# Altium PCB PCB_PlacaIndividual_v00_.PcbDoc
Units mm, origin at the board's own origin, x right, y up, seen from the top; angles counter-clockwise.
Board outline 50.04 x 23.74 mm, 2 copper layers (Top Layer, Bottom Layer); 27 components, 39 nets, 126 pads, 0 vias.
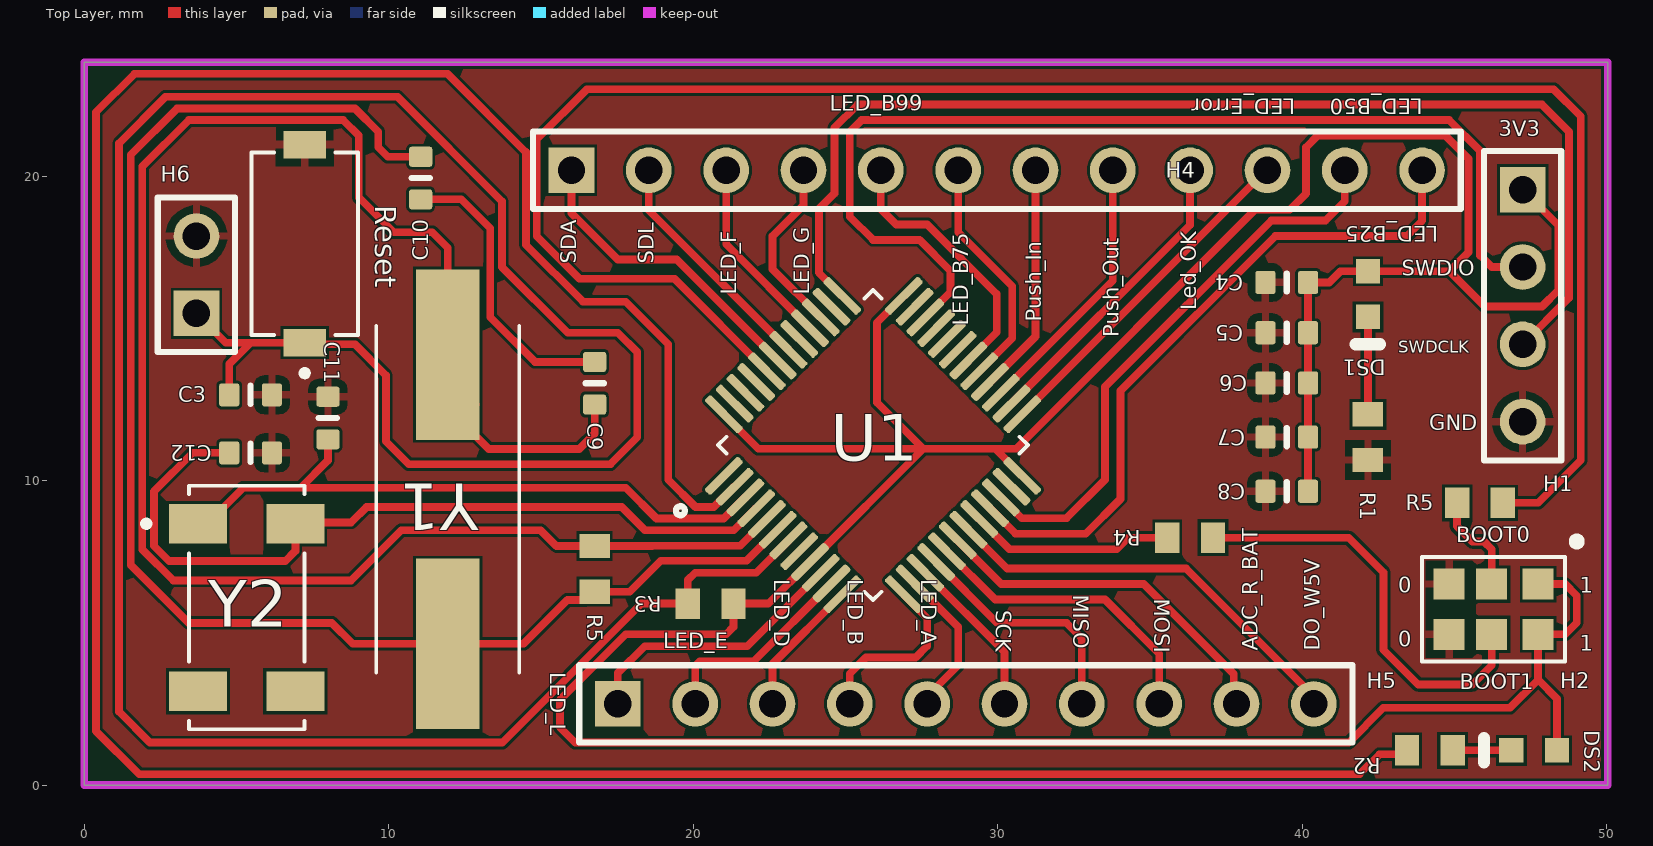
[diagram p0: Top Layer view]
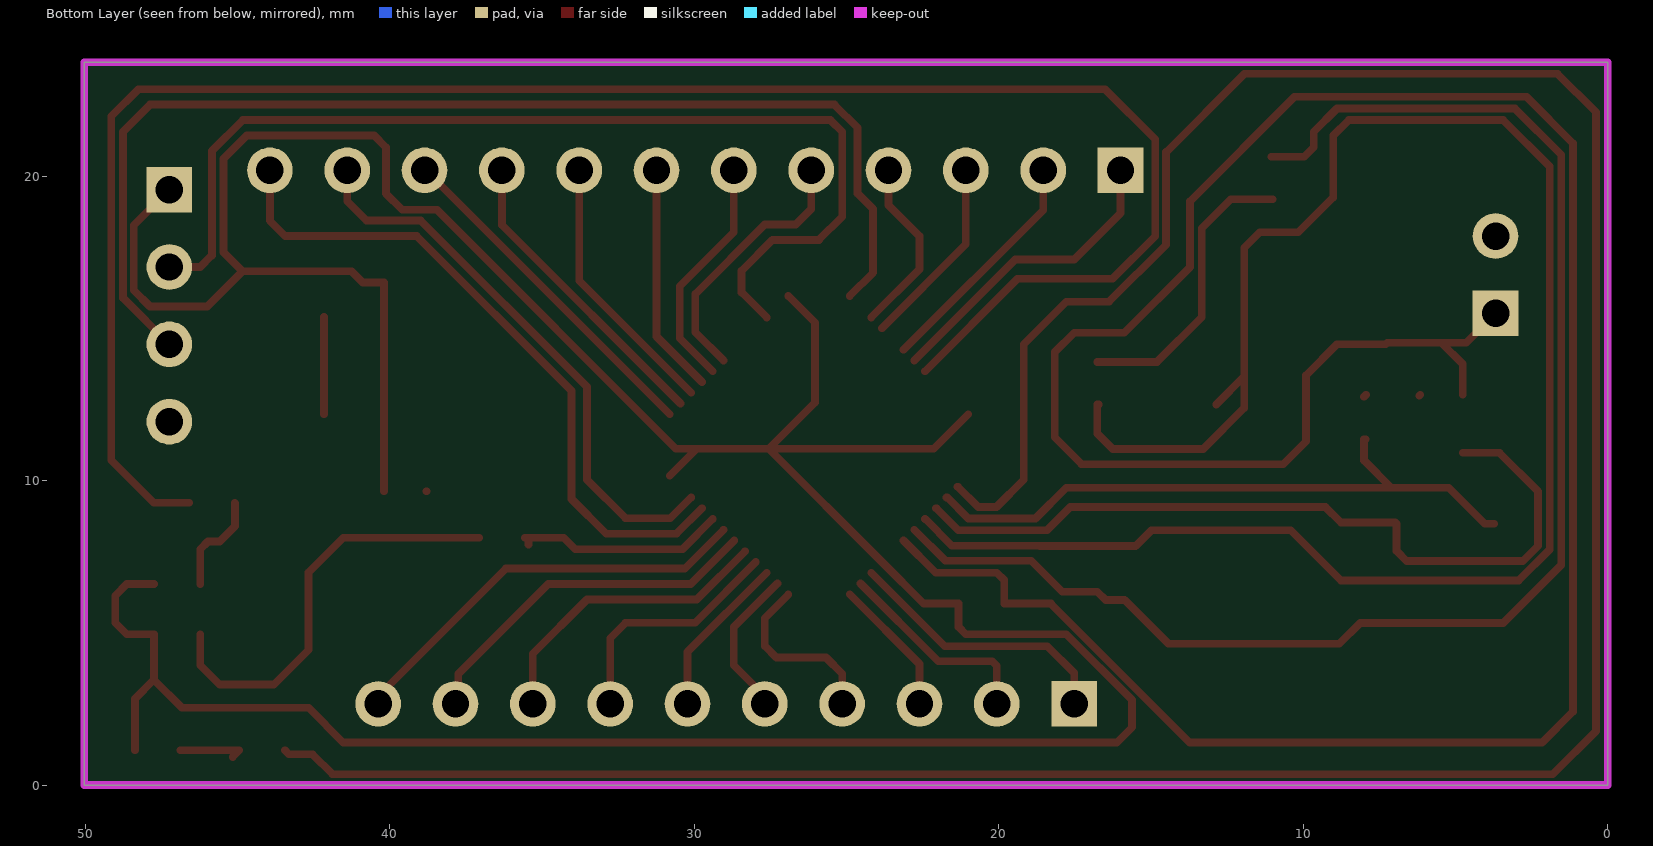
[diagram p1: Bottom Layer view, seen from below]
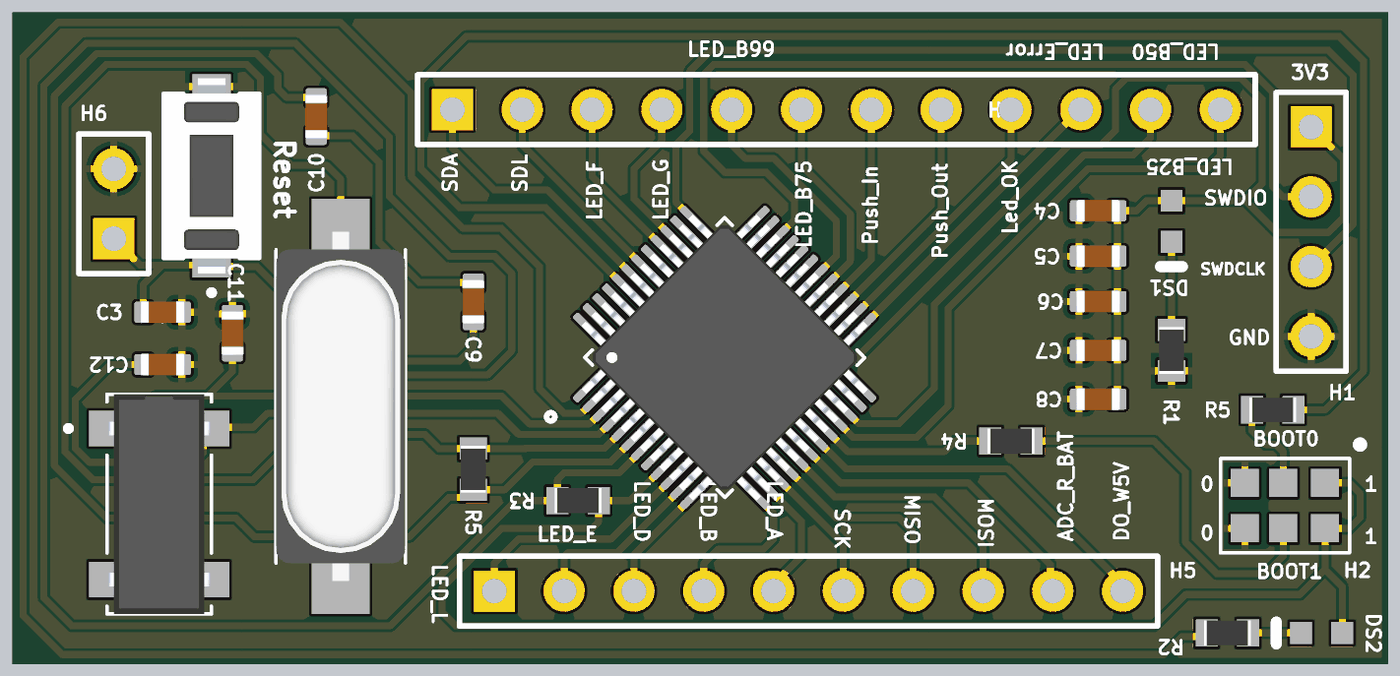
[diagram p2: 3D render of the assembled board from above, using the file's embedded part models]

## Layer stack, top to bottom
Top Solder: solder mask 0.0102, Solder Resist, Dk 3.5
Top Layer: signal copper 0.0356
Dielectric 1: dielectric 0.32, FR-4, Dk 4.8
Bottom Layer: signal copper 0.0356
Bottom Solder: solder mask 0.0102, Solder Resist, Dk 3.5

## Board outline
0,0 0,23.741 50.038,23.741 50.038,0

## Design rules (kind name [scope] priority, off if disabled: settings)
Clearance [All] p1: gap=0.1 ignorepadtopadclearanceinfootprint=FALSE
PolygonConnect [All] p1: connectstyle=Relief reliefconductorwidth=0.254 reliefentries=4 polygonreliefangle="90 Angle" airgapwidth=0.254
RoutingVias [All] p1: holewidth=0.3 width=0.8 viastyle="Through Hole" minholewidth=0.3 minwidth=0.8 maxholewidth=0.3 maxwidth=0.8
SolderMaskExpansion [All] p1: expansion=0.102 istentingtop=FALSE
SupplyNets "Schematic Supply Nets_1" [InNet('GND')] p1: voltage=0.000
SupplyNets "Schematic Supply Nets" [InNet('VCC3V3')] p2: voltage=0.000
Width [All] p1: maxlimit=0.254 minlimit=0.254 preferedwidth=0.254
30 further rules are at their usual default settings.

## Components (designator, comment, footprint, x,y, rotation, side; value= is the part's Value field where it differs from the comment)
C3 "Capacitor 10µF +/-20% 10V 0603" CAPC0603(1608)100_L 5.461,12.819 r0 top value=1µF
C4 "Capacitor 10µF +/-20% 10V 0603" CAPC0603(1608)100_L 39.497,16.51 r180 top value=0.1µF
C5 "Capacitor 10µF +/-20% 10V 0603" CAPC0603(1608)100_L 39.497,14.859 r180 top value=0.1µF
C6 "Capacitor 10µF +/-20% 10V 0603" CAPC0603(1608)100_L 39.497,13.208 r180 top value=0.1µF
C7 "Capacitor 10µF +/-20% 10V 0603" CAPC0603(1608)100_L 39.497,11.43 r180 top value=0.1µF
C8 "Capacitor 10µF +/-20% 10V 0603" CAPC0603(1608)100_L 39.497,9.652 r180 top value=0.1µF
C9 "Capacitor 10µF +/-20% 10V 0603" CAPC0603(1608)100_L 16.764,13.2 r270 top value=20pF
C10 "Capacitor 10µF +/-20% 10V 0603" CAPC0603(1608)100_L 11.049,19.939 r90 top value=20pF
C11 "Capacitor 10µF +/-20% 10V 0603" CAPC0603(1608)100_L 8.001,12.057 r270 top value=20pF
C12 "Capacitor 10µF +/-20% 10V 0603" CAPC0603(1608)100_L 5.461,10.914 r180 top value=20pF
DS1 "LTW-C191TS5" LTST-LTW-C191TS5_V 42.164,16.129 r270 top
DS2 "LTW-C191TS5" LTST-LTW-C191TS5_V 47.625,1.143 r180 top
H1 "Header 4" HDR1X4 47.244,19.558 r270 top
H2 "MHDR2X3" SW_219-3LPSTR 45.339,4.191 r270 top
H4 "Header 12" HDR1X12 16.002,20.193 r0 top
H5 "Header 10" HDR1X10 17.526,2.667 r0 top
H6 "Header 2" HDR1X2 3.683,15.494 r90 top
R1 "Resistor 10k +/-1% 0603 100 mW" RESC1608X55X25ML10T15 42.164,11.43 r270 top value=510
R2 "Resistor 10k +/-1% 0603 100 mW" RESC1608X55X25ML10T15 44.196,1.143 r180 top value=510
R3 "Resistor 10k +/-1% 0603 100 mW" RESC1608X55X25ML10T15 20.574,5.961 r180 top value=10K
R4 "Resistor 10k +/-1% 0603 100 mW" RESC1608X55X25ML10T15 36.322,8.128 r0 top value=100K
R5 "Resistor 10k +/-1% 0603 100 mW" RESC1608X55X25ML10T15 45.847,9.271 r180 top value=100K
R5 "Resistor 10k +/-1% 0603 100 mW" RESC1608X55X25ML10T15 16.764,7.104 r270 top value=1M
Reset "PTS636_SM43J_SMTR_LFS" SW_PTS636_SM43J_SMTR_LFS 7.239,17.78 r90 top
U1 "STM32F103C8T6" QFP50P900X900X160-48N 25.908,11.168 r45 top
Y1 "ABLS-8.000MHZ-B2-T" XTAL_ABLS-8.000MHZ-B2-T 11.938,9.39 r270 top
Y2 "MC-306_32.768K-E3" XTAL_MC-306_32.768K-E3 5.334,5.834 r0 top

## Footprints (in the part's own frame and the unit in brackets; to place one, negate y for a bottom-side part, rotate by r counter-clockwise, add the part's x,y. Pads: shape width x height; smd on the part's side, far side on the other; paste and mask are expansions set on the pad)
CAPC0603(1608)100_L [mm] "Chip Capacitor, Body 1.6x0.8mm, Height 1.0mm, IPC High Density"
  rrect25% 0.66x0.76 smd: 1(-0.7,0) 2(0.7,0)
  silkscreen extent 0,-0.3 0,0.3, body extent -0.8,-0.4 0.8,0.4, height 0.95
HDR1X2 [mm] "Connector; Header; 2 Position"
  rect 1.5x1.5 hole 0.9: 1(0,0)
  round 1.5 hole 0.9: 2(2.54,0)
  silkscreen extent -1.27,-1.27 3.81,1.27
HDR1X4 [mm] "Connector; Header; 4 Position"
  rect 1.5x1.5 hole 0.9: 1(0,0)
  round 1.5 hole 0.9: 2(2.54,0) 3(5.08,0) 4(7.62,0)
  silkscreen extent -1.27,-1.27 8.89,1.27
HDR1X10 [mm] "Connector; Header; 10 Position"
  rect 1.5x1.5 hole 0.9: 1(0,0)
  round 1.5 hole 0.9: 2(2.54,0) 3(5.08,0) 4(7.62,0) 5(10.16,0) 6(12.7,0) 7(15.24,0) 8(17.78,0) 9(20.32,0) 10(22.86,0)
  silkscreen extent -1.27,-1.27 24.13,1.27
HDR1X12 [mm] "Connector; Header; 12 Position"
  rect 1.5x1.5 hole 0.9: 1(0,0)
  round 1.5 hole 0.9: 2(2.54,0) 3(5.08,0) 4(7.62,0) 5(10.16,0) 6(12.7,0) 7(15.24,0) 8(17.78,0) 9(20.32,0) 10(22.86,0) 11(25.4,0) 12(27.94,0)
  silkscreen extent -1.27,-1.27 29.21,1.27
LTST-LTW-C191TS5_V [mm] "SMD, 2-Leads, Body 1.6x0.8mm"
  rect 0.8x0.8 smd: 1(-0.75,0) 2(0.75,0)
  silkscreen extent 1.65,-0.4 1.65,0.4, body extent -0.8,-0.4 0.8,0.4, height 0.65
QFP50P900X900X160-48N [mm]
  rrect50% 1.56x0.28 smd: 1(-4.18,2.75) 2(-4.18,2.25) 3(-4.18,1.75) 4(-4.18,1.25) 5(-4.18,0.75) 6(-4.18,0.25) 7(-4.18,-0.25) 8(-4.18,-0.75) 9(-4.18,-1.25) 10(-4.18,-1.75) 11(-4.18,-2.25) 12(-4.18,-2.75) 25(4.18,-2.75) 26(4.18,-2.25) 27(4.18,-1.75) 28(4.18,-1.25) 29(4.18,-0.75) 30(4.18,-0.25) 31(4.18,0.25) 32(4.18,0.75) 33(4.18,1.25) 34(4.18,1.75) 35(4.18,2.25) 36(4.18,2.75)
  rrect50% 0.28x1.56 smd: 13(-2.75,-4.18) 14(-2.25,-4.18) 15(-1.75,-4.18) 16(-1.25,-4.18) 17(-0.75,-4.18) 18(-0.25,-4.18) 19(0.25,-4.18) 20(0.75,-4.18) 21(1.25,-4.18) 22(1.75,-4.18) 23(2.25,-4.18) 24(2.75,-4.18) 37(2.75,4.18) 38(2.25,4.18) 39(1.75,4.18) 40(1.25,4.18) 41(0.75,4.18) 42(0.25,4.18) 43(-0.25,4.18) 44(-0.75,4.18) 45(-1.25,4.18) 46(-1.75,4.18) 47(-2.25,4.18) 48(-2.75,4.18)
  silkscreen extent -6.15,-3.6 3.6,3.6, body extent -4.5,-4.5 4.5,4.5, height 1.6
RESC1608X55X25ML10T15 [mm] "Chip Resistor, 2-Leads, Body 1.70x0.90mm, IPC Low Density"
  rect 0.8x1 smd: 1(-0.75,0) 2(0.75,0)
  body extent -0.85,-0.45 0.85,0.45, height 0.55
SW_219-3LPSTR [mil]
  rect 40x40 smd: 1(-95,95) 2(-95,35) 3(-95,-20) 4(-30,95) 5(-30,35) 6(-30,-20)
  silkscreen extent -154,-55 5,149
SW_PTS636_SM43J_SMTR_LFS [mm]
  rect 0.9x1.4 smd: 1(-3.25,0) 2(3.25,0)
  silkscreen extent -4.35,-1.75 3,1.75, body extent -3.55,-1.75 3.55,1.75, height 4.3
XTAL_ABLS-8.000MHZ-B2-T [mm]
  rect 5.6x2.1 smd: 1(-4.75,0) 2(4.75,0)
  silkscreen extent -5.7,-2.35 5.7,2.35, body extent -6.35,-2.35 6.35,2.35, height 4.06
XTAL_MC-306_32.768K-E3 [mm]
  rect 1.9x1.3 smd: 1(-1.6,2.75) 2(-1.6,-2.75) 3(1.6,-2.75) 4(1.6,2.75)
  silkscreen extent -3.4,-4 1.9,4, body extent -1.85,-4 1.85,4, height 2.54

## Part data
C3 C4 C5 C6 C7 C8 C9 C10 C11 C12: library part CMP-001-00075-4, "Chip Capacitor, 10µF +/-20%, 10V, 0603, Thickness 1 mm", Case/Package=0603, Max Operating Temperature=85°C, Min Operating Temperature=-55°C, Tolerance=10%, Voltage Rating=10V, Mounting Technology=SMT, Pins=2
DS1 DS2: library part CMP-007-00027-2, "LED Uni-Color White, 70 mW, 20 mA, -20 to 80 degC, 2-Pin SMD, RoHS, Tape and Reel", Case/Package=0603, Colour=White, Forward Current=5mA, Forward Voltage=3.15V, Manufacturer=Lite-On, Max Operating Temperature=80°C, Min Operating Temperature=-20°C, Package Description="2-Pin Surface Mount Device, Body 1.6 x 0.8 mm", Package Quantity=1, Power=70mW, Datasheet URL=http://optoelectronics.liteon.com/upload/download/DS22-2004-201/S_110_LTW-C191TS5.pdf, Datasheet Version="Rev. B, 06/2010", Illumination Colour=White, Lens Style=Diffused, Luminous Intensity=28mcd, Manufacturer URL=http://www.us.liteon.com/, Mounting Technology=SM, Nominal Vf=2.93V, Package Reference=LTW-C191TS5, Packaging=TapeandReel, Pins=2, RoHS Compliant=True, Viewing Angle=130degrees
H1: "Header, 4-Pin", LatestRevisionDate=17-Jul-2002, LatestRevisionNote="Re-released for DXP Platform.", Publisher="Altium Limited"
H2: "Header, 3-Pin, Dual row", LatestRevisionDate=17-Jul-2002, LatestRevisionNote="Re-released for DXP Platform.", Publisher="Altium Limited"
H4: "Header, 12-Pin", LatestRevisionDate=17-Jul-2002, LatestRevisionNote="Re-released for DXP Platform.", Publisher="Altium Limited"
H5: "Header, 10-Pin", LatestRevisionDate=17-Jul-2002, LatestRevisionNote="Re-released for DXP Platform.", Publisher="Altium Limited"
H6: "Header, 2-Pin", LatestRevisionDate=17-Jul-2002, LatestRevisionNote="Re-released for DXP Platform.", Publisher="Altium Limited"
R1 R2 R3 R4 R5 R5: library part CMP-009-00017-5, "Chip Resistor, 10 KOhm, +/- 1%, 01 W, -55 to 155 degC, 0603 (1608 Metric)", Case/Package=0603, Max Operating Temperature=155°C, Min Operating Temperature=-55°C, Power=100mW, Tolerance=1%, Voltage Rating=50V, Mounting Technology=SM, Pins=2, RoHS Compliant=True
Reset: "Tactile Switch SPST-NO Top Actuated Surface Mount", Package=None, Availability=Unavailable, MP=PTS636_SM43J_SMTR_LFS, Price=None
U1: "ARM® Cortex®-M3 STM32F1 Microcontroller IC 32-Bit 72MHz 64KB (64K x 8) FLASH 48-LQFP (7x7)", Package="LQFP-48 STMicroelectronics", Check_prices=https://www.snapeda.com/parts/STM32F103C8T6/STMicroelectronics/view-part/?ref=eda, MF=STMicroelectronics, MP=STM32F103C8T6, SnapEDA_Link=https://www.snapeda.com/parts/STM32F103C8T6/STMicroelectronics/view-part/?ref=snap
Y1: "HC/49US (AT49) SMD LOW PROFILE CRYSTAL", Package="HC49/US Abracon", Availability="In Stock", Check_prices=https://www.snapeda.com/parts/ABLS-8.000MHZ-B2-T/Abracon+LLC/view-part/?ref=eda, MF="Abracon LLC", MP=ABLS-8.000MHZ-B2-T, Price=None, Purchase-URL=https://pricing.snapeda.com/search/part/ABLS-8.000MHZ-B2-T/?ref=eda, SnapEDA_Link=https://www.snapeda.com/parts/ABLS-8.000MHZ-B2-T/Abracon+LLC/view-part/?ref=snap
Y2: "CRYSTAL 32.7680KHZ 6PF SMD", Package="NON STANDARD-4 EPSON", Availability="In Stock", Check_prices=https://www.snapeda.com/parts/MC-306%2032.768K-E3/EPSON/view-part/?ref=eda, MF=EPSON, MP="MC-306 32.768K-E3", Price=None, Purchase-URL="https://pricing.snapeda.com/search/part/MC-306 32.768K-E3/?ref=eda", SnapEDA_Link=https://www.snapeda.com/parts/MC-306%2032.768K-E3/EPSON/view-part/?ref=snap

## Nets (pads, with @x,y where several pads share a name; then routed paths per layer and width w, separated by ;. In a path a pad name is that pad's centre, name@x,y a point inside that pad or via, vN(x,y) a via of type N, cw(c..) or ccw(c..) an arc to the next point about the centre after c; other vN are vias at no path point)
GND: C3.2 C4.2 C5.2 C6.2 C7.2 C8.2 C11.1 C12.1 H1.4 H2.3 H2.6 H6.2 R1.2 Reset.2 | length 0.2
  Top Layer w0.254: C3.2 C3.2@6.192,12.788 ; C11.1@7.938,12.821 C11.1 C11.1@7.97,12.788 ; C8.2@38.793,9.656 C8.2 ; H1.4@46.728,11.93 H1.4@46.736,11.938
NetC3_1: C3.1 H6.1 R3.2 Reset.1 U1.7 | length 89.6
  Top Layer w0.254: H6.1 4.647,14.53 5.461,14.53 ; C3.1 4.761,13.83 5.461,14.53 ; U1.7 22.071,6.977 20.066,6.977 19.824,6.735 R3.2 18.288,5.961 13.724,1.397 2.159,1.397 1.143,2.413 1.143,21.082 2.667,22.606 10.287,22.606 13.716,19.177 13.716,17.018 15.875,14.859 17.526,14.859 18.161,14.224 18.161,11.422 17.28,10.541 10.66,10.541 9.906,11.295 9.906,13.462 8.89,14.478 7.291,14.478 Reset.1 5.461,14.53
NetC9_1: C9.1 C10.1 | length 9.7
  Top Layer w0.254: C10.1@10.999,19.239 C10.1 12.384,19.239 13.335,18.288 13.335,15.367 14.802,13.9 C9.1
NetC9_2: C9.2 R5.1@16.764,7.854 U1.5 Y1.1 | length 61.5
  Top Layer w0.254: Y1.1@12.861,12.5 Y1.1@11.938,13.423 ; C9.2@16.714,12.5 C9.2 16.764,11.549 16.256,11.041 13.287,11.041 11.938,12.39 Y1.1@11.938,13.423 ; U1.5 21.545,7.866 18.669,7.866 18.657,7.854 16.764,7.854 15.506,7.854 14.986,8.374 10.414,8.374 8.763,6.723 2.921,6.723 1.905,7.739 1.905,20.32 3.429,21.844 8.509,21.844 9.017,21.336 9.017,19.304 10.16,18.161 11.43,18.161 11.938,17.653 Y1.1@11.938,13.423
NetC10_2: C10.2 R5.2@16.764,6.354 U1.6 Y1.2 | length 48.5
  Top Layer w0.254: C10.2 9.968,20.639 9.652,20.955 9.652,21.463 8.89,22.225 3.048,22.225 1.524,20.701 1.524,7.231 3.429,5.326 8.128,5.326 8.814,4.64 Y1.2 14.427,4.64 15.868,6.081 16.491,6.081 16.764,6.354 17.919,6.354 18.931,7.366 21.752,7.366 U1.6
NetC11_2: C11.2 U1.3 Y2.1 | length 21.2
  Top Layer w0.254: Y2.1 4.034,8.584 5.221,9.771 7.112,9.771 ; C11.2@7.951,11.357 C11.2 8.001,10.787 8.001,10.66 7.112,9.771 ; U1.3 21.696,9.45 21.002,8.755 18.796,8.755 17.78,9.771 7.112,9.771
NetC12_2: C12.2 U1.4 Y2.4 | length 26.7
  Top Layer w0.254: C12.2 3.556,10.914 2.286,9.644 2.286,7.859 2.787,7.358 6.604,7.358 6.934,7.688 Y2.4 6.978,8.628 8.763,8.628 9.271,9.136 17.653,9.136 18.415,8.374 21.328,8.374 22.05,9.096 U1.4
NetDS1_2: DS1.2 R1.1 | length 3.2
  Top Layer w0.254: R1.1 DS1.2
NetDS2_2: DS2.2 R2.1 | length 2.2
  Top Layer w0.254: R2.1@45.163,0.926 R2.1 DS2.2
NetH1_2: H1.2 U1.34 | length 35
  Top Layer w0.254: U1.34 28.448,16.183 28.448,16.891 27.432,17.907 25.908,17.907 25.146,18.669 25.146,21.463 25.527,21.844 44.831,21.844 45.847,20.828 45.847,17.399 46.228,17.018 H1.2
NetH1_3: H1.3 U1.37 | length 38.5
  Top Layer w0.254: U1.37 24.13,16.835 24.13,18.923 24.638,19.431 24.638,21.59 25.4,22.352 47.879,22.352 48.768,21.463 48.768,16.002 H1.3
NetH2_2: H2.2 R5.2@45.097,9.271 | length 3.4
  Top Layer w0.254: R5.2@45.097,9.271 45.085,9.259 45.085,8.509 45.593,8.001 45.974,8.001 46.228,7.747 H2.2
NetH2_5: H2.5 R4.2 | length 13.9
  Top Layer w0.254: R4.2 41.529,8.128 42.672,6.985 42.672,4.445 43.815,3.302 45.593,3.302 46.228,3.937 H2.5
NetH4_1: H4.1 U1.43 | length 10.2
  Top Layer w0.254: H4.1 16.002,18.788 17.526,17.264 19.458,17.264 U1.43
NetH4_2: H4.2 U1.42 | length 7.8
  Top Layer w0.254: H4.2 18.542,18.888 U1.42
NetH4_3: H4.3 U1.40 | length 6.3
  Top Layer w0.254: H4.3 21.082,17.762 U1.40
NetH4_4: H4.4 U1.39 | length 5.9
  Top Layer w0.254: H4.4 23.622,19.05 22.606,18.034 22.606,16.945 U1.39
NetH4_5: H4.5 U1.30 | length 8.8
  Top Layer w0.254: H4.5 26.162,18.923 26.67,18.415 27.686,18.415 29.972,16.129 29.972,14.879 U1.30
NetH4_6: H4.6 U1.29 | length 7.8
  Top Layer w0.254: H4.6 28.702,18.161 30.48,16.383 30.48,14.679 U1.29
NetH4_7: H4.7 U1.28 | length 7.6
  Top Layer w0.254: U1.28 31.242,14.734 H4.7
NetH4_8: H4.8 U1.27 | length 8.8
  Top Layer w0.254: U1.27 33.782,16.567 H4.8
NetH4_9: H4.9 U1.26 | length 10.1
  Top Layer w0.254: U1.26 36.322,18.4 H4.9
NetH4_10: H4.10 U1.25 | length 11.4
  Top Layer w0.254: U1.25 38.822,20.193 H4.10
NetH4_11: H4.11 U1.22 | length 18.7
  Top Layer w0.254: U1.22 30.788,8.763 32.258,8.763 33.528,10.033 33.528,13.081 38.989,18.542 40.767,18.542 41.402,19.177 H4.11
NetH4_12: H4.12 U1.21 | length 22.5
  Top Layer w0.254: U1.21 30.589,8.255 32.893,8.255 34.036,9.398 34.036,12.954 39.116,18.034 43.434,18.034 43.942,18.542 H4.12
NetH5_1: H5.1 U1.10 | length 9
  Top Layer w0.254: H5.1 17.526,3.683 18.407,4.564 21.779,4.564 U1.10
NetH5_2: H5.2 U1.11 | length 6.8
  Top Layer w0.254: H5.2 20.066,3.915 20.215,4.064 21.986,4.064 U1.11
NetH5_3: H5.3 U1.12 | length 4.5
  Top Layer w0.254: H5.3 22.606,3.977 U1.12
NetH5_4: H5.4 U1.13 | length 5.9
  Top Layer w0.254: H5.4 25.146,3.661 25.676,4.191 27.305,4.191 27.686,4.572 27.686,5.483 26.919,6.249 U1.13
NetH5_5: H5.5 U1.14 | length 5
  Top Layer w0.254: U1.14 28.702,5.192 28.702,3.937 27.686,2.921 H5.5
NetH5_6: H5.6 U1.15 | length 5.4
  Top Layer w0.254: U1.15 30.226,4.375 H5.6
NetH5_7: H5.7 U1.16 | length 8
  Top Layer w0.254: U1.16 29.974,5.334 32.258,5.334 32.766,4.826 H5.7
NetH5_8: H5.8 U1.17 | length 10
  Top Layer w0.254: U1.17 29.919,6.096 33.528,6.096 35.306,4.318 H5.8
NetH5_9: H5.9 U1.18 | length 11.9
  Top Layer w0.254: U1.18 30.119,6.604 34.798,6.604 37.753,3.649 37.753,2.76 H5.9
NetH5_10: H5.10 U1.19 | length 13.9
  Top Layer w0.254: U1.19 30.318,7.112 36.195,7.112 40.386,2.921 H5.10
NetR2_2: R2.2 U1.2 | length 96.4
  Top Layer w0.254: U1.2 21.343,9.803 20.676,9.136 20.074,9.136 19.177,10.033 19.177,14.478 17.78,15.875 16.383,15.875 14.505,17.753 14.505,20.793 11.93,23.368 1.651,23.368 0.381,22.098 0.381,1.778 1.805,0.354 41.883,0.354 42.545,1.016 43.319,1.016 R2.2
NetR4_1: R4.1 U1.20 | length 7
  Top Layer w0.254: U1.20 30.39,7.747 33.909,7.747 34.29,8.128 R4.1 ; R4.1@35.445,7.901 R4.1@35.445,8.128
NetR5_1: R5.1@46.597,9.271 U1.44 | length 62.4
  Top Layer w0.254: U1.44 19.386,16.629 16.264,16.629 14.859,18.034 14.859,21.209 16.51,22.86 48.26,22.86 49.149,21.971 49.149,10.668 47.752,9.271 R5.1@46.597,9.271
VCC3V3: C4.1 C5.1 C6.1 C7.1 C8.1 DS1.1 DS2.1 H1.1 H2.1 H2.4 R3.1 U1.9 U1.24 U1.36 U1.48 | length 119
  Top Layer w0.254: U1.48 22.138,11.049 27.557,11.049 ; U1.36 26.035,15.184 26.035,12.571 27.557,11.049 ; U1.24 29.916,11.049 ; C8.1 C7.1 C6.1 C5.1 C4.1 40.894,16.51 41.263,16.879 DS1.1 44.843,16.879 ; H1.1 48.414,18.388 48.414,16.256 47.879,15.721 46.001,15.721 44.843,16.879 ; H2.1 48.641,6.604 49.022,6.223 49.022,5.334 48.641,4.953 H2.4 47.752,3.463 ; DS2.1 48.375,2.84 47.752,3.463 ; 27.557,11.049 29.916,11.049 ; 27.557,11.049 U1.9 22.469,5.961 R3.1 21.324,5.195 21.082,4.953 17.781,4.953 15.621,2.793 15.621,1.905 16.129,1.397 41.529,1.397 42.672,2.54 46.829,2.54 47.752,3.463 ; 29.916,11.049 30.607,11.049 38.454,18.896 39.597,18.896 40.132,19.431 40.132,20.955 40.513,21.336 44.704,21.336 45.466,20.574 45.466,17.502 44.843,16.879
pads on no net: U1.1 U1.8 U1.23 U1.31 U1.32 U1.33 U1.35 U1.38 U1.41 U1.45 U1.46 U1.47 Y2.2 Y2.3

## Polygon pours and split planes (outlines as drawn)
GND on Top Layer "GND_L01_P000" (solid, pour order 0): 0,23.749 0,0 50.038,0 50.038,23.749

## Keep-outs
Keep-Out Layer:
  the board outline again, w0.254

## Silkscreen, mask and mechanical layers (free items; w line width, h text height)
Top Overlay:
  text "LED_Error" at 39.778,22.55 h0.5 r180
  text "LED_B50" at 43.969,22.55 h0.5 r180
  text "LED_B99" at 24.484,22.154 h0.5
  text "3V3" at 46.455,21.309 h0.5
  text "LED_B25" at 44.477,18.359 h0.5 r180
  text "SDA" at 16.156,17.118 h0.5 r90
  text "SDL" at 18.696,17.118 h0.5 r90
  text "SWDIO" at 43.28,16.737 h0.5
  text "LED_F" at 21.407,16.102 h0.5 r90
  text "LED_G" at 23.82,16.102 h0.5 r90
  text "Led_OK" at 36.52,15.594 h0.5 r90
  text "Push_In" at 31.44,15.213 h0.5 r90
  text "LED_B75" at 29.027,15.086 h0.5 r90
  text "Push_Out" at 33.98,14.705 h0.5 r90
  text "SWDCLK" at 43.153,14.197 h0.4
  text "GND" at 44.169,11.657 h0.5
  text "BOOT0" at 45.058,7.974 h0.5
  text "LED_D" at 22.662,6.758 h0.5 r270
  text "LED_B" at 25.075,6.758 h0.5 r270
  text "LED_A" at 27.488,6.758 h0.5 r270
  text "0" at 43.153,6.323 h0.5
  text "1" at 49.122,6.323 h0.5
  text "MISO" at 32.485,6.25 h0.5 r270
  text "MOSI" at 35.152,6.123 h0.5 r270
  text "SCK" at 29.945,5.742 h0.5 r270
  text "0" at 43.153,4.545 h0.5
  text "LED_E" at 19.023,4.501 h0.5
  text "ADC_R_BAT" at 38.552,4.418 h0.5 r90
  text "DO_W5V" at 40.584,4.418 h0.5 r90
  text "1" at 49.122,4.418 h0.5
  text "LED_L" at 15.296,3.71 h0.5 r270
  text "BOOT1" at 45.185,3.148 h0.5